# Altium PCB PD_Board.PcbDoc
Units mm, origin at the board's own origin, x right, y up, seen from the top; angles counter-clockwise.
Board outline 127.76 x 94.49 mm, 2 copper layers (Top Layer, Bottom Layer), stack 1.64 mm thick; 22 components, 8 nets, 74 pads, 0 vias.
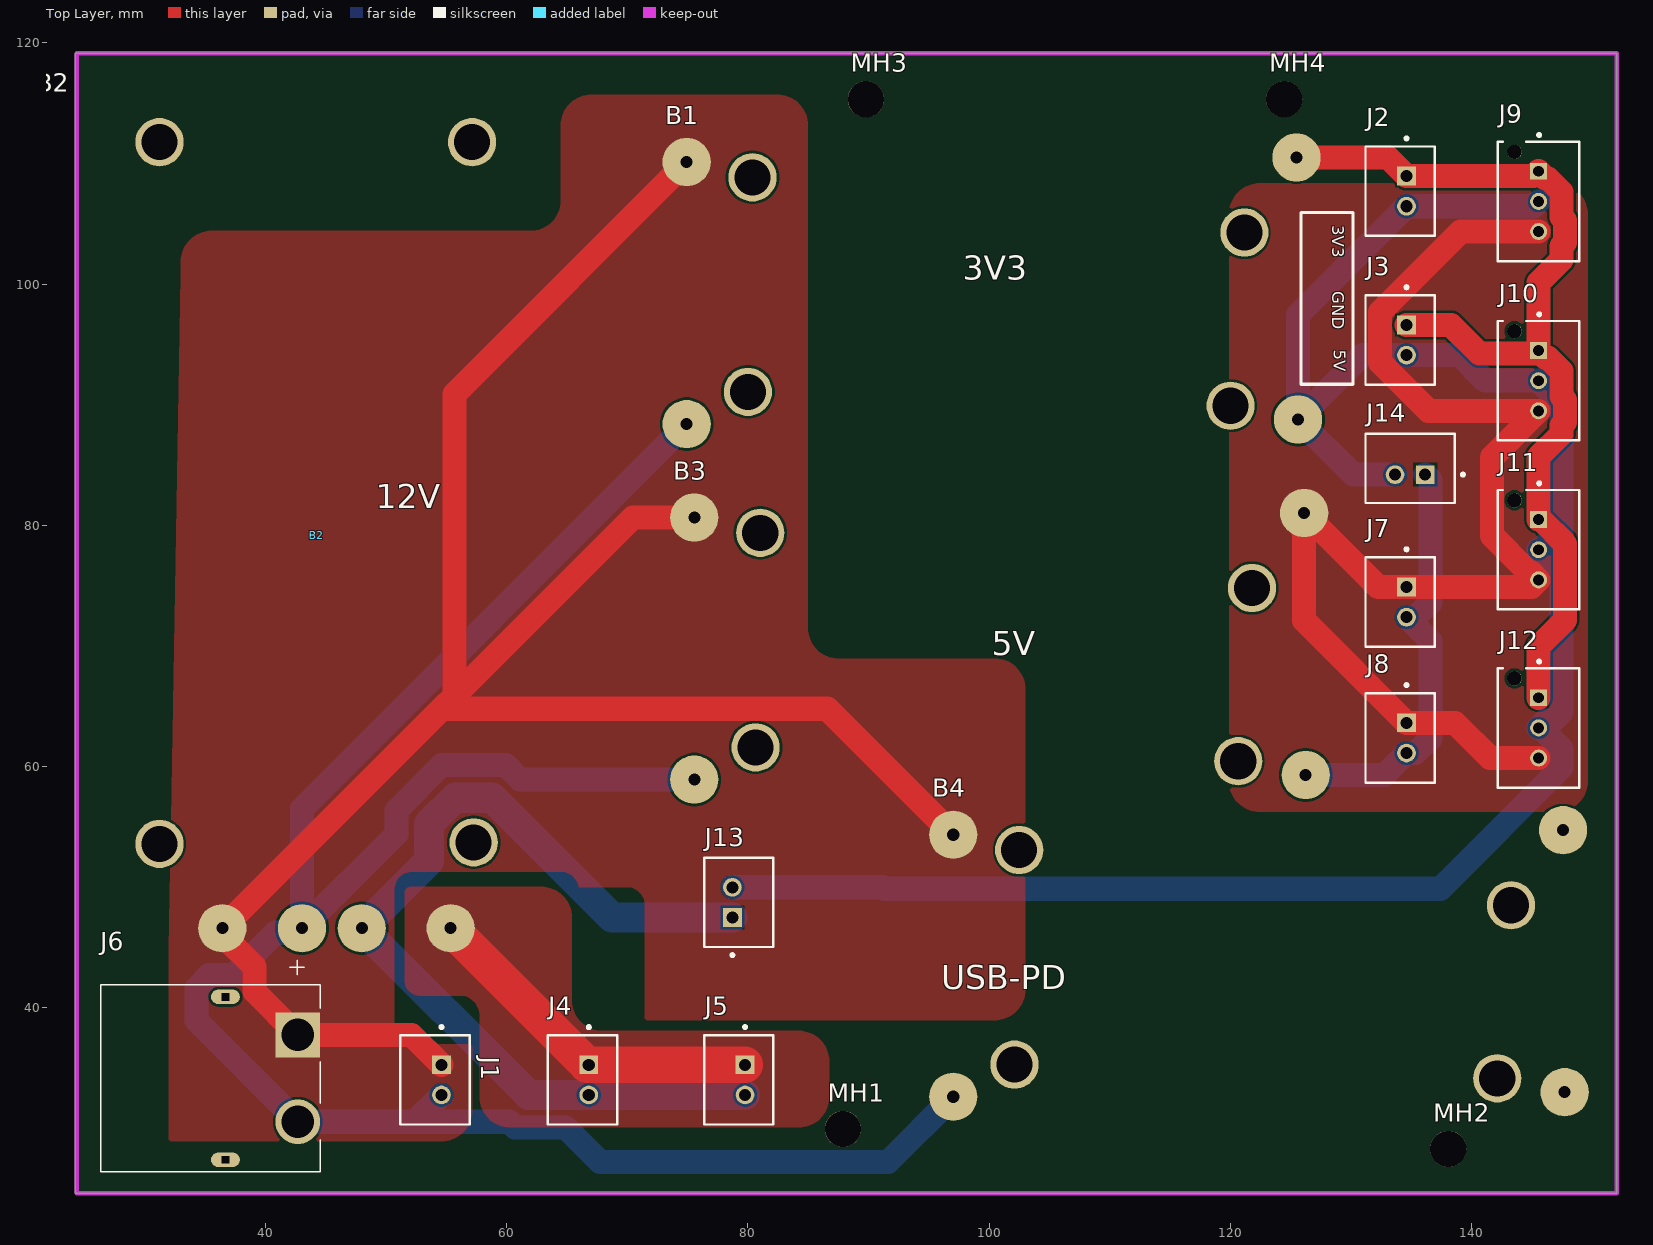
[diagram p0: Top Layer view]
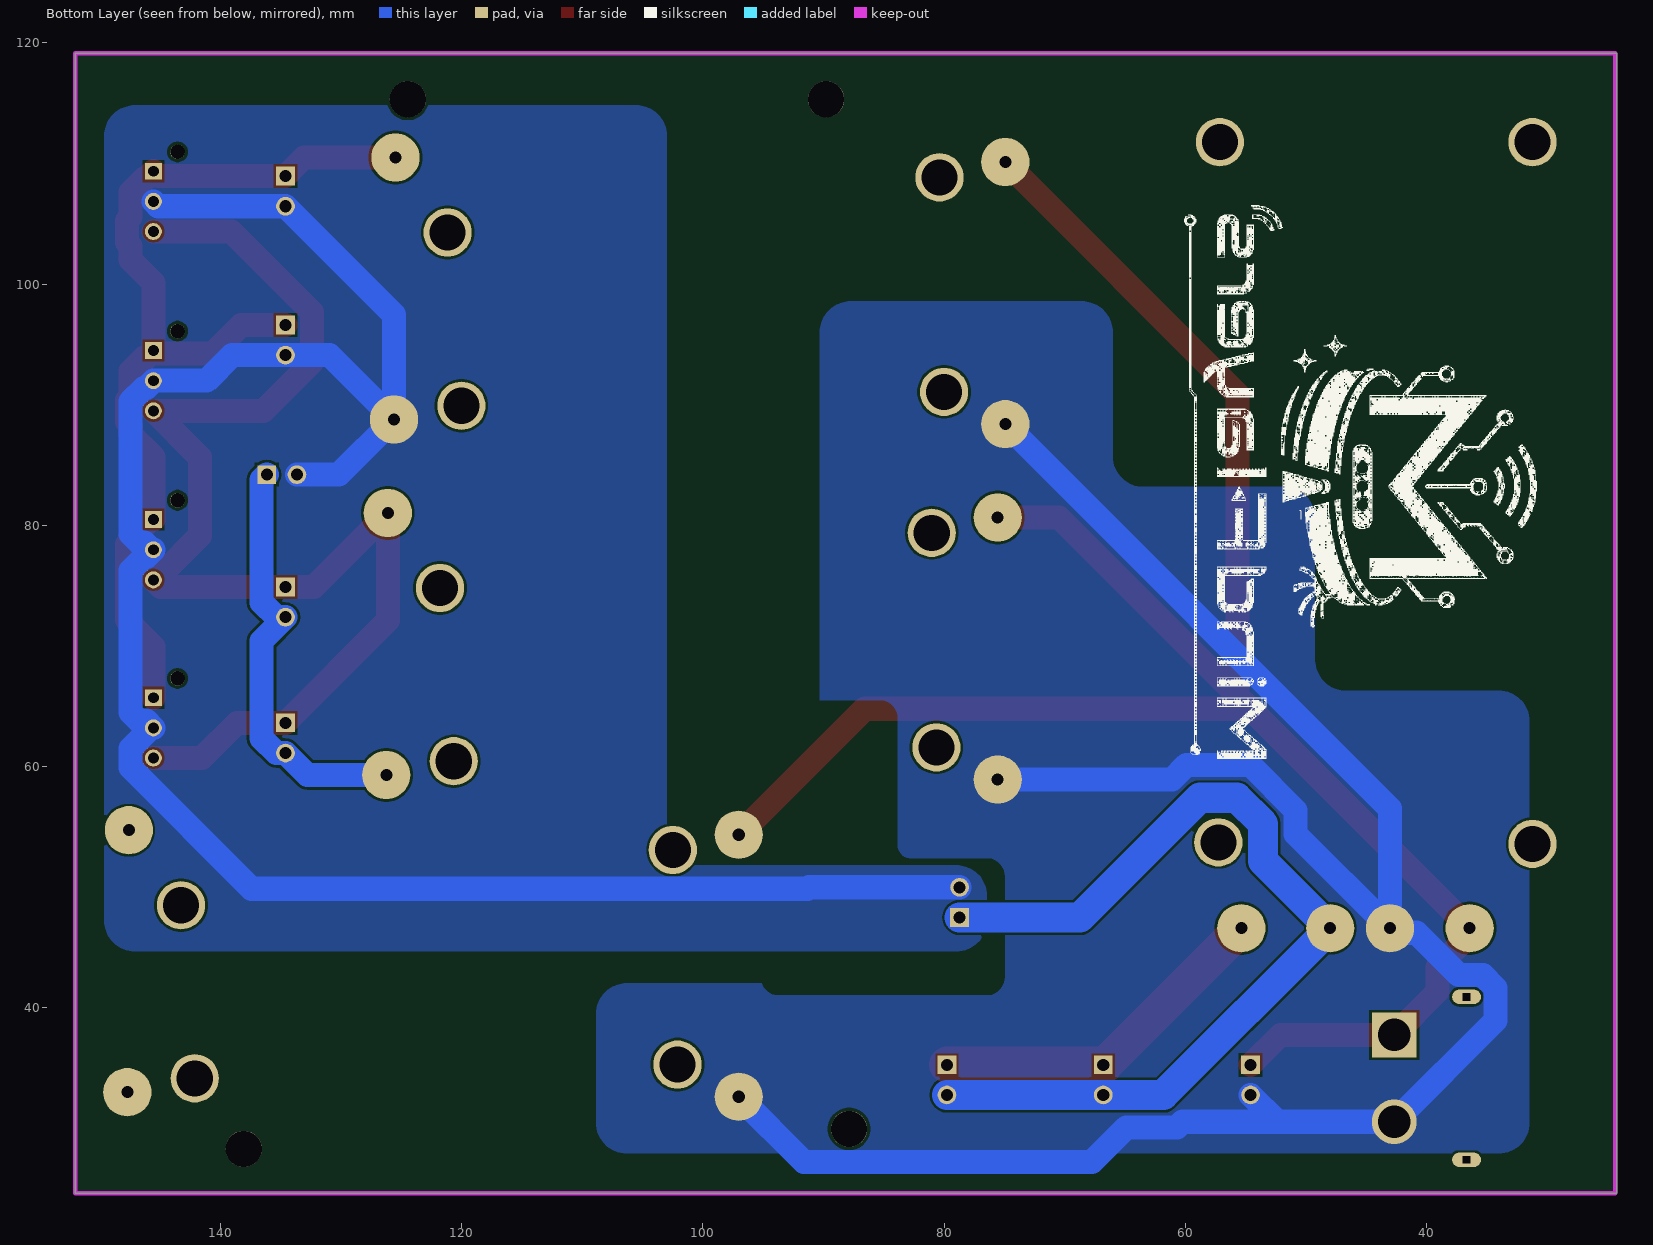
[diagram p1: Bottom Layer view, seen from below]
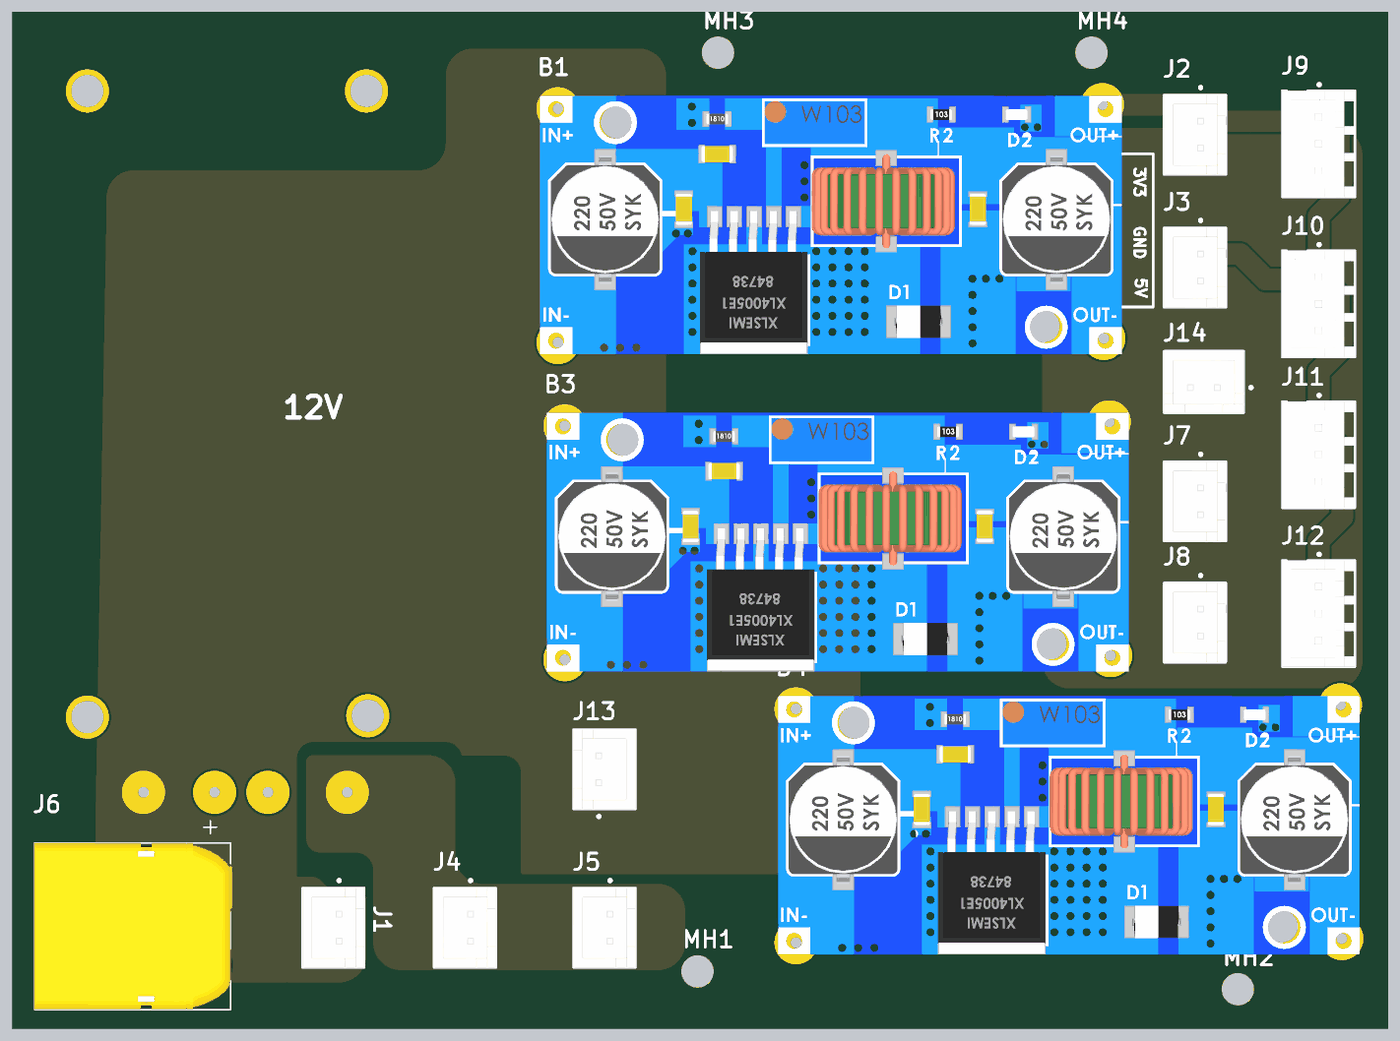
[diagram p2: 3D render of the assembled board from above, using the file's embedded part models]

## Layer stack, top to bottom
Top Solder: solder mask 0.0127, Solder Resist, Dk 3.8
Top Layer: signal copper 0.07
Dielectric 1: dielectric 1.5, FR-4, Dk 4.5
Bottom Layer: signal copper 0.07
Bottom Solder: solder mask 0.0127, Solder Resist, Dk 3.8

## Board outline
24.257,24.638 152.019,24.638 152.019,119.126 24.257,119.126

## Design rules (kind name [scope] priority, off if disabled: settings)
Clearance [All] p1: gap=0.203 ignorepadtopadclearanceinfootprint=FALSE except(0.25: Arc-Hole Track-Hole SMDPad-Hole THPad-Hole Via-Hole Fill-Hole Poly-Hole Region-Hole Text-Hole)
HoleSize [All] p1: absolutevalues=TRUE maxlimit=6.3 minlimit=0.3 maxpercent=80.000 minpercent=20.000
PolygonConnect [All] p1: connectstyle=Direct reliefconductorwidth=0.254 reliefentries=4 polygonreliefangle="90 Angle" airgapwidth=0.254
RoutingVias [All] p1: holewidth=0.711 width=1.27 viastyle="Through Hole" minholewidth=0.711 minwidth=1.27 maxholewidth=0.711 maxwidth=1.27
SolderMaskExpansion [All] p1: expansion=0 istentingtop=FALSE
SupplyNets "Schematic Supply Nets_2" [InNet('3V3')] p1: voltage=0.000
SupplyNets "Schematic Supply Nets_1" [InNet('GND')] p2: voltage=0.000
SupplyNets "Schematic Supply Nets" [InNet('5V')] p3: voltage=0.000
Width [All] p1: maxlimit=25.4 minlimit=0.203 preferedwidth=0.203 minimp=50.000000 maximp=50.000000 favimp=50.000000
29 further rules are at their usual default settings.

## Components (designator, comment, footprint, x,y, rotation, side; value= is the part's Value field where it differs from the comment)
B1 "Buck" Buck 94.869,102.108 r0 top
B2 "Boost" Boost 46.99,88.265 r270 top
B3 "Buck" Buck 95.504,72.644 r0 top
B4 "Buck" Buck 116.967,46.355 r0 top
J1 "B2B-XH-A(LF)(SN)" FP-B2B-XH-A_LF_SN-MFG 54.085,34.036 r270 top
J2 "B2B-XH-A(LF)(SN)" FP-B2B-XH-A_LF_SN-MFG 134.069,107.696 r270 top
J3 "B2B-XH-A(LF)(SN)" FP-B2B-XH-A_LF_SN-MFG 134.069,95.357 r270 top
J4 "B2B-XH-A(LF)(SN)" FP-B2B-XH-A_LF_SN-MFG 66.294,34.036 r270 top
J5 "B2B-XH-A(LF)(SN)" FP-B2B-XH-A_LF_SN-MFG 79.248,34.036 r270 top
J6 "XT60PW-M" AMASS_XT60PW-M 36.703,34.163 r270 top
J7 "B2B-XH-A(LF)(SN)" FP-B2B-XH-A_LF_SN-MFG 134.069,73.64 r270 top
J8 "B2B-XH-A(LF)(SN)" FP-B2B-XH-A_LF_SN-MFG 134.069,62.377 r270 top
J9 "BH3B-XH-2(LF)(SN)" FP-BH3B-XH-2_LF_SN-MFG 145.542,106.847 r90 top
J10 "BH3B-XH-2(LF)(SN)" FP-BH3B-XH-2_LF_SN-MFG 145.542,91.988 r90 top
J11 "BH3B-XH-2(LF)(SN)" FP-BH3B-XH-2_LF_SN-MFG 145.542,77.978 r90 top
J12 "BH3B-XH-2(LF)(SN)" FP-BH3B-XH-2_LF_SN-MFG 145.542,63.21 r90 top
J13 "B2B-XH-A(LF)(SN)" FP-B2B-XH-A_LF_SN-MFG 79.248,48.748 r90 top
J14 "B2B-XH-A(LF)(SN)" FP-B2B-XH-A_LF_SN-MFG 134.894,84.726 r180 top
MH1 "MH" MH 87.884,29.972 r0 top
MH2 "MH" MH 138.049,28.321 r0 top
MH3 "MH" MH 89.789,115.316 r0 top
MH4 "MH" MH 124.46,115.316 r0 top

## Footprints (in the part's own frame and the unit in brackets; to place one, negate y for a bottom-side part, rotate by r counter-clockwise, add the part's x,y. Pads: shape width x height; smd on the part's side, far side on the other; paste and mask are expansions set on the pad)
AMASS_XT60PW-M [mm]
  rect 3.716x3.716 / inner round 3.716 / far side rect 3.716x3.716 hole 2.7 mask+0.102: 1(-3.6,6)
  round 3.716 hole 2.7 mask+0.102: 2(3.6,6)
  oval 1.2x2.4 hole 0.6 square mask+0.102: SH1(-6.75,0) SH2(6.75,0)
  silkscreen extent -9.8,-10.35 7.75,7.85, body extent -7.75,-10.35 7.75,7.85, height 8.4
Boost [mm]
  round 4 hole 3: 1(-23.495,10.16) 2(-23.495,-15.748) 3(34.544,10.287) 4(34.671,-15.748)
  round 4 hole 1: 5(41.656,-10.541) 6(41.656,-3.937) 7(41.656,8.382) 8(41.656,1.016)
  body extent -26.91,-26.29 38.09,20.71, height 22
Buck [mm]
  round 4 hole 3: 1(-14.478,6.731) 2(-14.859,-11.049) 3(26.289,2.159) 4(25.146,-12.192)
  round 4 hole 1: 5(-19.939,8.001) 6(-19.939,-13.716) 7(30.607,8.382) 8(30.734,-13.335)
  body extent -21.61,-14.81 32.39,9.21, height 14.59
FP-B2B-XH-A_LF_SN-MFG [mm]
  rect 1.55x1.55 hole 1 paste-2539.97 mask+0: 1(-1.25,0.525)
  round 1.55 hole 1 paste-2539.97 mask+0: 2(1.25,0.525)
  silkscreen extent -4.5,-2.88 3.7,2.88, body extent -3.8,-2.98 3.8,2.98, height 0.25
FP-BH3B-XH-2_LF_SN-MFG [mm]
  rect 1.4x1.4 hole 0.9 paste-2539.97 mask+0: 1(2.5,0)
  round 1.4 hole 0.9 paste-2539.97 mask+0: 2(0,0) 3(-2.5,0)
  round 1.2 hole 1.2 unplated paste-2539.97 mask+0: ""(4.1,2)
  silkscreen extent -4.95,-3.37 5.62,3.37, body extent -5.05,-3.47 5.05,3.47, height 0.25
MH [mm]
  round 3 hole 3: 2(0,0)

## Part data
J1 J2 J3 J4 J5 J7 J8 J13 J14: library part CMP-2000-05888-3, "CONN HEADER VERT 2POS 2.5MM", Color=Natural, Contact Resistance=20mR, Current Rating=3A, Housing Color=White, Insulation Resistance=1GR, Max Operating Temperature=85°C, Max Voltage Rating (AC)=250V, Min Operating Temperature=-25°C, Connector Type="Male Pin", Contact Material=Brass, Contact Plating=Tin, Contact Type="Male Pin", Depth=5.75mm, Fastening Type=Detent, Housing Material=Polyamide, Lead Free="Lead Free", Lead Pitch=2.5mm, Length=7.4mm, Max Current Rating=3A, Max Voltage Rating (DC)=250V, Mount="Through Hole", Number of Contacts=2, Number of Positions=2, Number of Rows=1, Orientation=Straight, Packaging=Bulk, Pitch=2.5mm, REACH SVHC="No SVHC", Series=XH, Termination=Solder, Voltage Rating=250V, Voltage Rating (AC)=250V, Wire/Cable Gauge=22AWG
J6: "Socket, DC supply, male, PIN: 2", Package=Package, Check_prices=https://www.snapeda.com/parts/XT60PW-M/AMASS/view-part/?ref=eda, MF=AMASS, MP=XT60PW-M, SnapEDA_Link=https://www.snapeda.com/parts/XT60PW-M/AMASS/view-part/?ref=snap
J9 J10 J11 J12: library part CMP-17439-000649-1, "CONN HEADER VERT 3POS 2.5MM", Flammability Rating="UL94 V-0", Insulation Color=Natural, Max Operating Temperature=85°C, Min Operating Temperature=-25°C, Voltage Rating=250V, Connector Type=Header, Contact Finish - Mating=TIN, Contact Material=Brass, Contact Shape=Square, Contact Type="Male Pin", Fastening Type=Detent, Height=14.2mm, Insulation Material=Nylon, Lead Free="Lead Free", Length=9.9mm, Mated Stacking Heights=9.8mm, Mount="Through Hole", Number of Poles=3, Number of Positions=3, Number of Rows=1, Packaging=Bulk, Pitch=2.5mm, Series=XH, Termination=Press-Fit, Width=5.75mm

## Nets (pads, with @x,y where several pads share a name; then routed paths per layer and width w, separated by ;. In a path a pad name is that pad's centre, name@x,y a point inside that pad or via, vN(x,y) a via of type N, cw(c..) or ccw(c..) an arc to the next point about the centre after c; other vN are vias at no path point)
3V3: B1.7 J2.1 J3.1 J9.1 J10.1 J11.1 J12.1 | length 82.4
  Top Layer w2: B1.7 133.05,110.49 J2.1 145.141,108.946 J9.1 146.139,108.75 146.33,108.75 147.445,107.635 147.445,105.56 147.745,105.26 147.745,103.434 147.445,103.134 147.445,102.013 145.542,100.11 J10.1 ; J3.1 138.267,96.607 140.636,94.238 145.292,94.238 J10.1 ; J12.1 145.542,69.949 147.745,72.152 147.745,78.466 145.734,80.478 J11.1 145.542,85.676 147.445,87.579 147.445,88.275 147.745,88.575 147.745,90.401 147.445,90.701 147.445,92.776 146.33,93.891 146.139,93.891 J10.1
5V: B3.7 J7.1 J8.1 J9.3 J10.3 J11.3 J12.3 | length 107.5
  Top Layer w2: J12.3 141.527,60.71 138.61,63.627 J8.1 126.111,72.11 B3.7 132.247,74.89 J7.1 144.954,74.89 J11.3 144.945,76.075 144.754,76.075 141.692,79.136 141.692,85.638 J10.3 136.415,89.488 132.391,93.513 132.391,97.655 139.082,104.347 J9.3
GND: B1.8 J2.2 J3.2 J9.2 J10.2 J11.2 J12.2 J13.2 J14.2 | length 175.4
  Bottom Layer w2: J13.2 91.212,49.998 91.327,49.883 137.406,49.883 147.445,59.922 147.445,61.498 145.734,63.21 J12.2 146.139,63.807 146.74,63.807 147.445,64.512 147.445,76.266 146.33,77.381 146.139,77.381 J11.2 145.707,77.978 146.304,78.575 146.74,78.575 147.445,79.28 147.445,90.276 146.33,91.391 146.139,91.391 J10.2 141.128,91.988 139.009,94.107 J3.2 130.937,94.107 B1.8 ; J14.2 130.175,84.201 B1.8 ; J9.2 145.141,106.446 J2.2 125.603,97.455 B1.8
NetB1_5: B1.5 B2.5 B3.5 B4.5 J1.1 J6.1 | length 176.5
  Top Layer w2: J1.1 52.133,37.763 J6.1 39.106,41.36 39.106,43.411 36.449,46.068 B2.5 54.638,64.798 ; B1.5 55.69,90.869 55.69,65.85 ; B3.5 70.485,80.645 55.69,65.85 ; B4.5 86.586,64.798 54.638,64.798 ; 54.638,64.798 55.69,65.85
NetB1_6: B1.6 B2.6 B3.6 B4.6 J1.2 J6.2 | length 181.2
  Bottom Layer w2: J1.2 52.387,30.563 ; B1.6 43.053,56.515 B2.6 ; B3.6 61.13,58.928 59.931,60.127 54.623,60.127 50.871,56.375 50.871,54.427 B2.6 ; B4.6 91.611,27.222 67.766,27.222 64.905,30.083 60.709,30.083 60.229,30.563 52.387,30.563 ; B2.6 42.67,46.226 40.848,46.226 37.338,42.716 35.356,42.716 34.3,41.66 34.3,38.966 J6.2 52.387,30.563
NetB2_7: B2.7 J4.1 J5.1 | length 29.1
  Top Layer w3: B2.7 66.695,35.286 J4.1 J5.1
NetB2_8: B2.8 J4.2 J5.2 J13.1 | length 78.6
  Bottom Layer w2.5: J13.1 68.737,47.498 58.811,57.424 55.743,57.424 53.574,55.255 53.574,52.177 B2.8 61.829,32.786 J4.2 J5.2
NetB3_8: B3.8 J7.2 J8.2 J14.1 | length 35.7
  Bottom Layer w2: B3.8 132.776,59.309 J8.2 135.346,61.127 136.572,62.354 136.572,70.412 J7.2 135.346,72.39 136.572,73.617 136.572,83.773 J14.1
pads on no net: B1.1 B1.2 B1.3 B1.4 B2.1 B2.2 B2.3 B2.4 B3.1 B3.2 B3.3 B3.4 B4.1 B4.2 B4.3 B4.4 B4.7 B4.8 J6.SH1 J6.SH2 J9. J10. J11. J12. MH1.2 MH2.2 MH3.2 MH4.2

## Polygon pours and split planes (outlines as drawn)
5V on Top Layer "5V_L01_P006" (solid, remove dead copper, pour order 6): 119.888,105.791 cw(c122.428,105.791) 122.428,108.331 147.066,108.331 cw(c147.066,105.791) 149.606,105.791 149.606,58.801 cw(c147.066,58.801) 147.066,56.261 122.428,56.261 cw(c122.428,58.801) 119.888,58.801 119.888,83.312
NetB2_7 on Top Layer "NETB2_7_L01_P004" (solid, pour order 4): 60.325,30.099 cw(c60.325,32.639) 57.785,32.639 57.785,39.37 ccw(c56.134,39.37) 56.134,41.021 52.832,41.021 cw(c52.832,42.291) 51.562,42.291 51.562,49.53 cw(c52.07,49.53) 52.07,50.038 62.865,50.038 cw(c62.865,47.498) 65.405,47.498 65.405,40.64 ccw(c67.945,40.64) 67.945,38.1 84.201,38.1 cw(c84.201,35.56) 86.741,35.56 86.741,32.639 cw(c84.201,32.639) 84.201,30.099 70.866,30.099
NetB1_5 on Top Layer "NETB1_5_L01_P000" (solid, remove dead copper, pour order 0): 50.698,38.481 50.698,49.784 cw(c52.197,49.784) 52.197,51.283 64.516,51.283 cw(c64.516,49.784) 65.997,50.013 69.977,50.013 cw(c69.977,48.514) 71.476,48.514 71.476,39.116 cw(c70.612,39.116) 71.466,38.989 100.457,38.989 ccw(c100.457,41.529) 102.997,41.529 102.997,66.421 ccw(c100.457,66.421) 100.457,68.961 87.503,68.961 cw(c87.503,71.501) 84.963,71.501 84.963,113.157 ccw(c82.423,113.157) 82.423,115.697 67.056,115.697 ccw(c67.056,113.157) 64.516,113.157 64.516,106.934 cw(c61.976,106.934) 61.976,104.394 35.56,104.394 ccw(c35.56,101.854) 33.02,101.854 33.02,100.711 32.004,44.831 32.004,29.083 cw(c31.877,29.083) 31.877,28.956 54.61,28.956 ccw(c54.61,31.496) 57.15,31.496 57.15,36.576 cw(c59.563,36.576) 57.184,36.982 52.197,36.982 cw(c52.197,38.481)
GND on Bottom Layer "GND_L02_P005" (solid, remove dead copper, pour order 5): 78.994,44.704 cw(c78.994,47.244) 76.454,47.244 76.454,49.276 cw(c78.994,49.276) 78.994,51.816 100.457,51.816 ccw(c100.457,54.356) 102.997,54.356 102.997,112.268 cw(c105.537,112.268) 105.537,114.808 147.066,114.808 cw(c147.066,112.268) 149.606,112.268 149.606,47.244 cw(c147.066,47.244) 147.066,44.704 97.282,44.704
NetB1_6 on Bottom Layer "NETB1_6_L02_P003" (solid, remove dead copper, pour order 3): 74.955,42.545 74.955,50.927 cw(c76.454,50.927) 76.454,52.426 82.804,52.426 ccw(c82.804,53.467) 83.845,53.467 83.845,64.008 cw(c85.344,64.008) 85.344,65.507 90.297,65.507 90.297,96.012 ccw(c87.757,96.012) 87.757,98.552 68.58,98.552 ccw(c68.58,96.012) 66.04,96.012 66.04,85.725 cw(c63.5,85.725) 63.5,83.185 51.816,83.185 ccw(c51.816,80.645) 49.276,80.645 49.276,68.834 cw(c46.736,68.834) 46.736,66.294 34.036,66.294 ccw(c34.036,63.754) 31.496,63.754 31.496,30.48 ccw(c34.036,30.48) 34.036,27.94 106.299,27.94 ccw(c106.299,30.48) 108.839,30.48 108.839,39.497 ccw(c106.299,39.497) 106.299,42.037 95.136,42.037 cw(c93.726,42.545) 93.726,41.046 76.454,41.046 cw(c76.454,42.545)

## Keep-outs
Keep-Out Layer:
  lines w0.4: 24.384,24.638 24.384,119.126 152.019,119.126 152.019,24.638 24.384,24.638

## Silkscreen, mask and mechanical layers (free items; w line width, h text height)
Top Overlay:
  lines w0.254: 125.857,91.694 130.175,91.694 130.175,105.918 125.857,105.918 125.857,91.694
  text "3V3" at 128.443,104.856 h1 r270
  text "3V3" at 97.809,100.349 h2
  text "GND" at 128.443,99.395 h1 r270
  text "5V" at 128.57,94.569 h1 r270
  text "12V" at 49.168,81.426 h2
  text "5V" at 100.222,69.234 h2
  text "USB-PD" at 96.031,41.548 h2
Bottom Overlay:
  drawing of 100 lines, arcs and shapes, not listed